# EAGLE board clk_master (EAGLE 9.6.1)
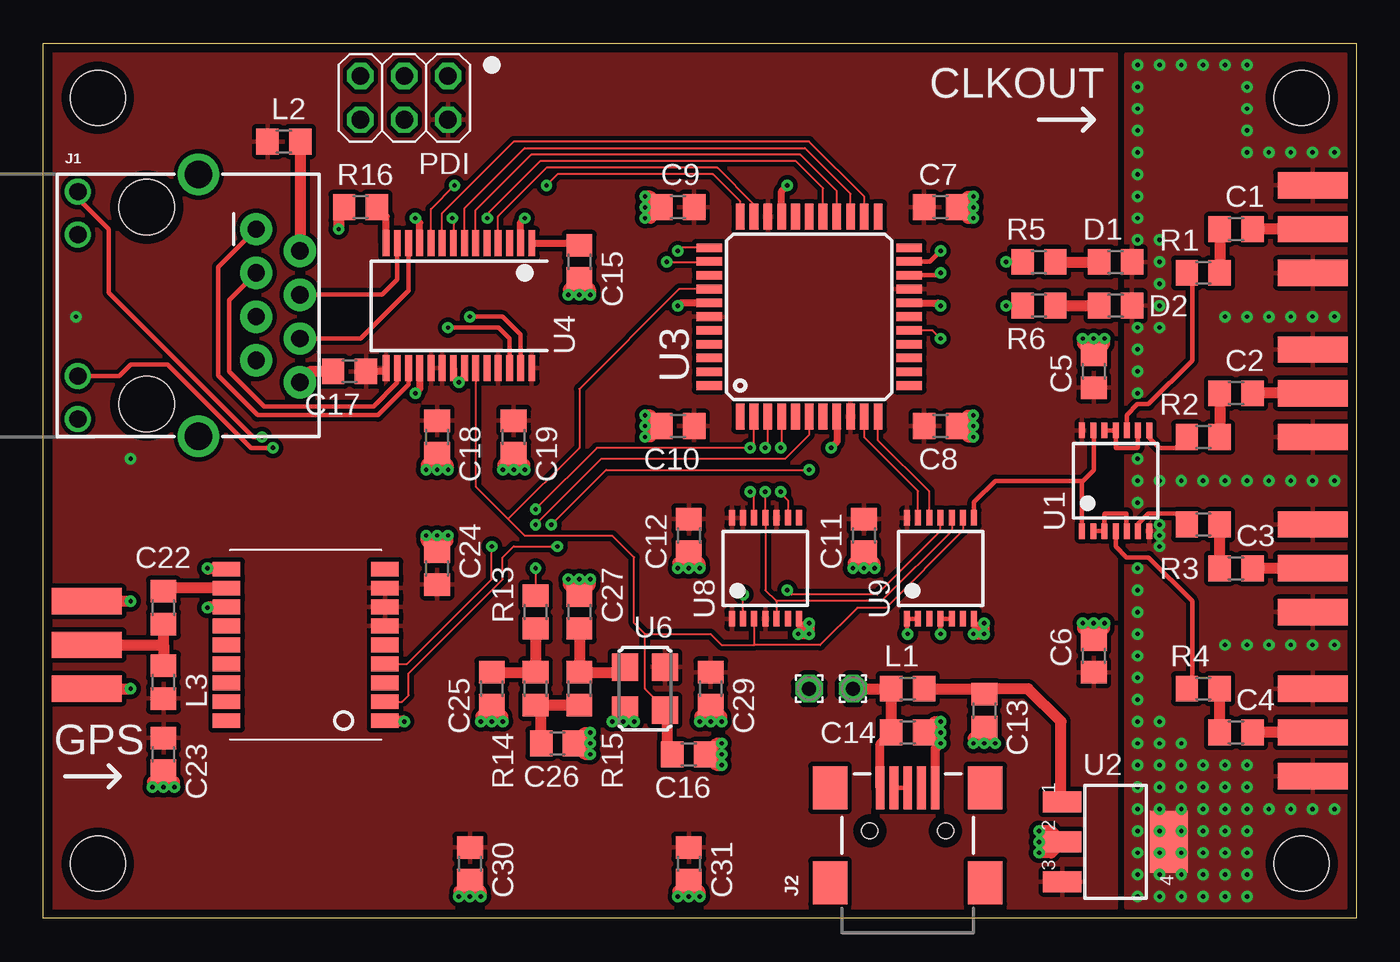
[diagram p0: board, top side]
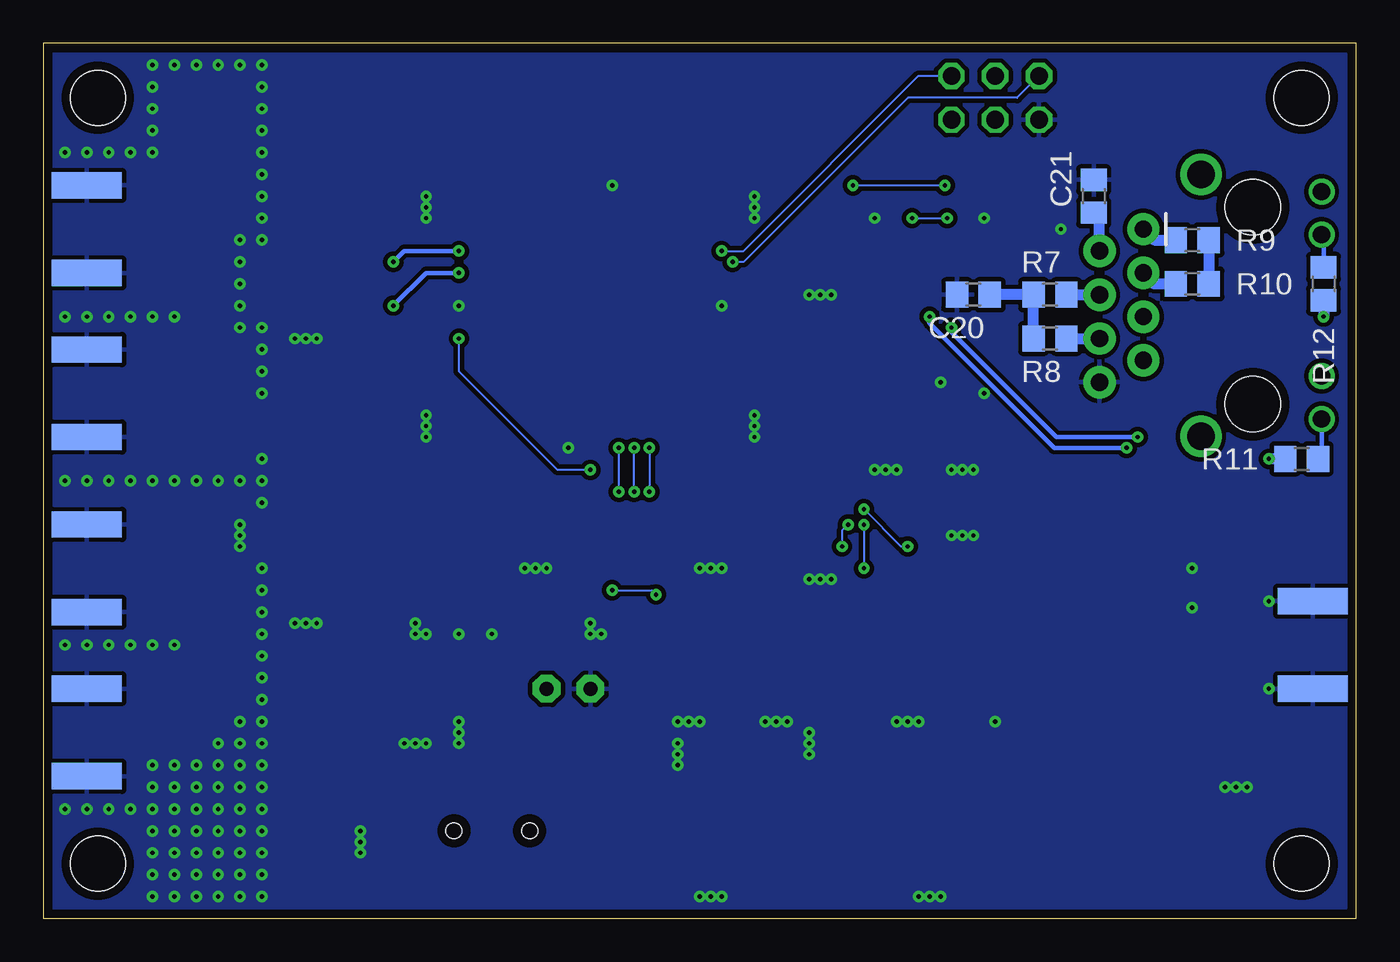
[diagram p1: board, bottom side, seen from below]

Size 76.2 x 50.8 mm. Coordinates in mm from the lower left corner, seen from the top.
Outline: 0,0 0,50.8 76.2,50.8 76.2,0 0,0
Copper layers (1*16): Top 0.035mm / dielectric 0.5mm / Bottom 0.035mm
Design rules "33each": minimum track width 5mil, minimum drill 10mil, track to track 5mil, track to pad 5mil, pad to pad 5mil, via to via 5mil, smd to smd 5mil, copper to edge 20mil, drill to drill 8mil, minimum pad ring 10mil, minimum via ring 8mil, stop-mask expansion 4mil, vias tented up to drill 0mil, thermal gap 10mil
Holes 3.17 mm at 3.17,3.17 73.03,3.17 73.03,47.62 3.17,47.62

## Footprints (pad centres in the part's own frame; a part is rotated, then mirrored left to right if it is on the bottom)
R0805 = smd 1.3 x 1.5: 1 -0.95,0; 2 0.95,0
1,6/0,8 = drill 0.813 pad 1.6 octagon: 1 0,0
SMA-EDGE = smd 1.524 x 4.064: GND@0 0,0; GND@1 5.08,0; SIG 2.54,0 | smd 1.524 x 4.064 bottom: GND@2 0,0; GND@3 5.08,0
MAGJACK = drill 1 pad 1.88: 1 3.175,17.445; 2 4.445,19.985; 3 5.715,17.445; 4 6.985,19.985; 5 8.255,17.445; 6 9.525,19.985; 7 10.795,17.445; 8 12.065,19.985 | drill 1 pad 1.27: 9 1,7.1; 10 3.5,7.1; 11 11.7,7.1; 12 14.2,7.1 | drill 1.6 pad 2.184: M1 0,14.1; M2 15.2,14.1 | hole 3.2: 1.905,11.095; 13.335,11.095
USB-MINIB = smd 2.5 x 0.5: D+ 2.5,0; D- 2.5,0.8; GND 2.5,-1.6; ID 2.5,-0.8; VBUS 2.5,1.6 | smd 2.5 x 2: S1 -3,4.5; S2 2.5,4.5; S3 -3,-4.5; S4 2.5,-4.5 | hole 0.9: 0,2.2; 0,-2.2
2X03 = drill 1.016 octagon: 1 -2.54,-1.27; 2 -2.54,1.27; 3 0,-1.27; 4 0,1.27; 5 2.54,-1.27; 6 2.54,1.27
TSSOP14 = smd 0.35 x 0.9: 1 -1.95,-2.925; 2 -1.3,-2.925; 3 -0.65,-2.925; 4 0,-2.925; 5 0.65,-2.925; 6 1.3,-2.925; 7 1.95,-2.925; 8 1.95,2.925; 9 1.3,2.925; 10 0.65,2.925; 11 0,2.925; 12 -0.65,2.925; 13 -1.3,2.925; 14 -1.95,2.925
SOT223 = smd 1.219 x 2.235: 1 -2.311,-3.099; 2 0,-3.099; 3 2.311,-3.099 | smd 3.6 x 2.2: 4 0,3.099
TQFP44 = smd 1.5 x 0.5: 1 -5.8,4; 2 -5.8,3.2; 3 -5.8,2.4; 4 -5.8,1.6; 5 -5.8,0.8; 6 -5.8,0; 7 -5.8,-0.8; 8 -5.8,-1.6; 9 -5.8,-2.4; 10 -5.8,-3.2; 11 -5.8,-4; 23 5.8,-4; 24 5.8,-3.2; 25 5.8,-2.4; 26 5.8,-1.6; 27 5.8,-0.8; 28 5.8,0; 29 5.8,0.8; 30 5.8,1.6; 31 5.8,2.4; 32 5.8,3.2; 33 5.8,4 | smd 0.5 x 1.5: 12 -4,-5.8; 13 -3.2,-5.8; 14 -2.4,-5.8; 15 -1.6,-5.8; 16 -0.8,-5.8; 17 0,-5.8; 18 0.8,-5.8; 19 1.6,-5.8; 20 2.4,-5.8; 21 3.2,-5.8; 22 4,-5.8; 34 4,5.8; 35 3.2,5.8; 36 2.4,5.8; 37 1.6,5.8; 38 0.8,5.8; 39 0,5.8; 40 -0.8,5.8; 41 -1.6,5.8; 42 -2.4,5.8; 43 -3.2,5.8; 44 -4,5.8
SSOP28 = smd 0.4 x 1.5: 1 -4.225,-3.625; 2 -3.575,-3.625; 3 -2.925,-3.625; 4 -2.275,-3.625; 5 -1.625,-3.625; 6 -0.975,-3.625; 7 -0.325,-3.625; 8 0.325,-3.625; 9 0.975,-3.625; 10 1.625,-3.625; 11 2.275,-3.625; 12 2.925,-3.625; 13 3.575,-3.625; 14 4.225,-3.625; 15 4.225,3.625; 16 3.575,3.625; 17 2.925,3.625; 18 2.275,3.625; 19 1.625,3.625; 20 0.975,3.625; 21 0.325,3.625; 22 -0.325,3.625; 23 -0.975,3.625; 24 -1.625,3.625; 25 -2.275,3.625; 26 -2.925,3.625; 27 -3.575,3.625; 28 -4.225,3.625
LCC-18 = smd 1.6 x 0.85: 1 -4.6,4.4; 2 -4.6,3.3; 3 -4.6,2.2; 4 -4.6,1.1; 5 -4.6,0; 6 -4.6,-1.1; 7 -4.6,-2.2; 8 -4.6,-3.3; 9 -4.6,-4.4; 10 4.6,-4.4; 11 4.6,-3.3; 12 4.6,-2.2; 13 4.6,-1.1; 14 4.6,0; 15 4.6,1.1; 16 4.6,2.2; 17 4.6,3.3; 18 4.6,4.4
ASF = smd 1.6 x 1.5: 1 -1.25,-1.15; 2 1.25,-1.15; 3 1.25,1.15; 4 -1.25,1.15

## Placement (x,y rotation side)
C1  47n  [R0805]  69.22,40.01 0 top
C2  47n  [R0805]  69.22,30.48 0 top
C3  47n  [R0805]  69.22,20.32 0 top
C4  47n  [R0805]  69.22,10.79 0 top
C5  100n  [R0805]  60.96,31.75 90 top
C6  100n  [R0805]  60.96,15.24 90 top
C7  100n  [R0805]  52.07,41.27 0 top
C8  100n  [R0805]  52.07,28.57 0 top
C9  100n  [R0805]  36.83,41.27 180 top
C10  100n  [R0805]  36.83,28.57 180 top
C11  100n  [R0805]  47.62,22.23 270 top
C12  100n  [R0805]  37.47,22.23 270 top
C13  100u  [R0805]  54.61,12.06 270 top
C14  100n  [R0805]  50.16,10.79 0 top
C15  10u  [R0805]  31.11,38.1 270 top
C16  unpopulated  [R0805]  37.47,9.53 0 top
C17  100n  [R0805]  17.78,31.75 180 top
C18  100n  [R0805]  22.86,27.94 270 top
C19  100n  [R0805]  27.3,27.94 270 top
C20  100n  [R0805]  22.23,36.2 180 bottom
C21  [R0805]  15.24,41.91 90 bottom
C22  47n  [R0805]  6.99,18.03 90 top
C23  100n  [R0805]  6.99,9.53 270 top
C24  100n  [R0805]  22.86,20.32 90 top
C25  100n  [R0805]  26.04,13.34 270 top
C26  3.3u  [R0805]  29.84,10.16 0 top
C27  100u  [R0805]  31.11,17.78 90 top
C29  100n  [R0805]  38.73,13.34 270 top
C30  100u  [R0805]  24.77,3.17 270 top
C31  100u  [R0805]  37.47,3.17 270 top
D1  [R0805]  62.23,38.1 0 top
D2  [R0805]  62.23,35.56 0 top
E$1  [1,6/0,8]  46.99,13.34 0 top
E$2  [1,6/0,8]  44.45,13.34 0 top
E$7  [SMA-EDGE]  73.66,37.47 90 top
E$8  [SMA-EDGE]  73.66,27.94 90 top
E$9  [SMA-EDGE]  73.66,17.78 90 top
E$10  [SMA-EDGE]  73.66,8.26 90 top
E$46  [SMA-EDGE]  2.54,13.34 90 top
J1  [MAGJACK]  -5.08,43.18 270 top
J2  [USB-MINIB]  50.16,5.08 90 top
L1  10u  [R0805]  50.16,13.34 180 top
L2  10u  [R0805]  13.97,45.09 180 top
L3  22n  [R0805]  6.99,13.72 90 top
PDI  [2X03]  20.95,47.62 180 top
R1  49.9  [R0805]  67.31,37.47 0 top
R2  49.9  [R0805]  67.31,27.94 0 top
R3  49.9  [R0805]  67.31,22.86 0 top
R4  49.9  [R0805]  67.31,13.34 0 top
R5  330  [R0805]  57.78,38.1 0 top
R6  330  [R0805]  57.78,35.56 0 top
R7  49.9  [R0805]  17.78,36.2 180 bottom
R8  49.9  [R0805]  17.78,33.66 180 bottom
R9  49.9  [R0805]  9.53,39.37 0 bottom
R10  49.9  [R0805]  9.53,36.83 0 bottom
R11  330  [R0805]  3.17,26.67 180 bottom
R12  330  [R0805]  1.91,36.83 270 bottom
R13  1k  [R0805]  28.57,17.78 90 top
R14  3.3k  [R0805]  28.57,13.34 90 top
R15  10k  [R0805]  31.11,13.34 90 top
R16  2.32k  [R0805]  18.41,41.27 180 top
U1  74LVCU04A  [TSSOP14]  62.23,25.4 0 top
U2  MCP1824ST-3302E  [SOT223]  62.23,4.45 270 top
U3  ATXMEGA16A4U  [TQFP44]  44.45,34.92 90 top
U4  ENC28J60  [SSOP28]  24.13,35.56 180 top
U5  TESEO-LIV3R  [LCC-18]  15.24,15.88 180 top
U6  SIT5156AI-FD-33VT-25.000000Y  [ASF]  34.92,13.34 270 top
U8  74LVC74A  [TSSOP14]  41.91,20.32 0 top
U9  74LVC86A  [TSSOP14]  52.07,20.32 0 top

## Library data of the parts
C1-C27 C29-C31 D1 D2 L1-L3 R1-R16 = rcl
E$1 E$2 = wirepad
E$7-E$10 E$46 = SparkFun-Retired
J1 J2 = SparkFun-Connectors
PDI = pinhead
U1 U8 U9 = 74xx-us
U2 = transistor
U3 = atmel
U4 = microchip
U5 = misc
U6 = crystal

## Nets
!INT: U3.32 U4.4
!RESET: PDI.5 U3.35
!RST: U3.33 U4.10
!SS: U3.24 U4.9
BPSK: U1.1 U1.13 U9.8
CCA: U3.10 U9.13
CCB: U3.11 U9.12
CLK_25MHZ: C16.1 U3.37 U4.23 U6.3 U8.3 U9.9
DAC0: R13.2 U3.6
FILT: C27.1 R15.2 U6.1
FILT1: C25.1 R13.1 R14.2
FILT2: C26.1 R14.1 R15.1
GND: C5.2 C6.2 C7.2 C8.2 C9.2 C10.2 C11.2 C12.2 C13.2 C14.2 C15.2 C16.2 C17.2 C18.2 C19.2 C20.2 C21.2 C23.2 C24.2 C25.2 C26.2 C27.2 C29.2 C30.2 C31.2 D1.2 D2.2 E$2.1 E$7.GND@0 E$7.GND@1 E$7.GND@2 E$7.GND@3 E$8.GND@0 E$8.GND@1 E$8.GND@2 E$8.GND@3 E$9.GND@0 E$9.GND@1 E$9.GND@2 E$9.GND@3 E$10.GND@0 E$10.GND@1 E$10.GND@2 E$10.GND@3 E$46.GND@0 E$46.GND@1 E$46.GND@2 E$46.GND@3 J1.8 J2.GND PDI.6 R16.2 U1.7 U2.2 U2.4 U3.8 U3.18 U3.30 U3.38 U4.2 U4.11 U4.18 U4.21 U4.22 U5.1 U5.10 U5.12 U6.2 U8.7 U9.1 U9.2 U9.4 U9.5 U9.7
GPS_ANT: C22.1 E$46.SIG L3.2
GPS_ANT1: C22.2 U5.11
GPS_TX: U3.16 U5.2
LED0: R6.1 U3.20
LED1: R5.1 U3.21
LEDA: J1.11 U4.27
LEDB: J1.9 U4.26
MISO: U3.26 U4.6
MOSI: U3.25 U4.7
OUT0: C1.2 E$7.SIG
OUT1: C2.2 E$8.SIG
OUT2: C3.2 E$9.SIG
OUT3: C4.2 E$10.SIG
PDI: PDI.1 U3.34
PPS: U3.2 U5.4 U8.12
RBIAS: R16.1 U4.14
S$5: C4.1 R4.2
S$6: C3.1 R3.2
S$7: C2.1 R2.2
S$8: C1.1 R1.2
S$9: R3.1 U1.6
S$10: R2.1 U1.8
S$11: R4.1 U1.4
S$12: R1.1 U1.10
S$13: U1.2 U1.3 U1.5
S$14: U1.9 U1.11 U1.12
S$19: J1.12 R11.1
S$22: J2.D+ J2.D-
S$36: D1.1 R5.2
S$37: D2.1 R6.2
S$49: R9.2 R10.2
S$50: C20.1 R7.2 R8.2
S$51: C21.1 J1.2 L2.1
S$54: J1.10 R12.1
SCK: U3.27 U4.8
SPPS: U3.3 U8.5 U8.11 U9.10
TPIN+: J1.4 R7.1 U4.13
TPIN-: J1.6 R8.1 U4.12
TPOUT+: J1.1 R9.1 U4.17
TPOUT-: J1.3 R10.1 U4.16
U/!D: U3.4 U8.9
UPPS: U8.2 U9.11
V3.3: C5.1 C6.1 C7.1 C8.1 C9.1 C10.1 C11.1 C12.1 C17.1 C18.1 C19.1 C23.1 C24.1 C29.1 C30.1 C31.1 L2.2 L3.1 PDI.2 R11.2 R12.2 U1.14 U2.3 U3.9 U3.19 U3.31 U3.39 U4.15 U4.19 U4.20 U4.25 U4.28 U5.6 U5.7 U5.8 U6.4 U8.1 U8.4 U8.10 U8.13 U8.14 U9.14
V5: C13.1 L1.1 U2.1
VBUS: C14.1 E$1.1 J2.VBUS L1.2
VCAP: C15.1 U4.1

## Tracks (layer width: path | path; a pad name or v marks a point on that pad's centre or on a via)
!INT
  Top 0.127: U4.4 26.41,40.76 29.21,43.56 39.12,43.56 41.25,41.43 U3.32
!RESET  (via drill 0.25)
  Top 0.127: v36.2,38.1 38.62,38.1 U3.35
  Bottom 0.127: PDI.5 19.68,47.62 26.04,47.62 35.56,38.1 v36.2,38.1
!RST  (via drill 0.25)
  Top 0.127: v29.21,42.55 29.84,43.18 38.86,43.18 40.45,41.59 U3.33 | U4.10 22.5,41.17 v23.88,42.55
  Bottom 0.127: v29.21,42.55 v23.88,42.55
!SS
  Top 0.127: U4.9 23.16,40.94 27.3,45.09 44.45,45.09 47.65,41.88 U3.24
BPSK
  Top 0.254: U1.1 60.28,25.36 60.33,25.4 | 60.33,25.4 60.96,26.04 60.96,28.3 U1.13 | U9.8 54.02,24.18 55.24,25.4 60.33,25.4
CCA
  Top 0.127: U3.10 47.65,27.91 50.77,24.8 U9.13
CCB
  Top 0.127: U3.11 48.45,27.75 51.42,24.78 U9.12
CLK_25MHZ
  Top 0.127: U4.23 25.11,25.06 26.99,23.18 | 26.99,23.18 27.94,22.23 33.02,22.23 34.29,20.95 34.29,17.14 34.92,16.51 | U9.9 53.37,22.51 48.9,18.03 47.24,18.03 45.09,15.88 41.27,15.88 | U8.3 41.26,15.89 41.27,15.88 | 26.99,23.18 31.11,27.3 31.11,30.73 36.91,36.52 U3.37 | 34.92,16.51 38.73,16.51 39.37,15.88 41.27,15.88 | 34.92,16.51 34.92,13.34 36.08,12.19 U6.3 36.2,11.96
  Top 0.635: C16.1 36.2,9.85 36.2,11.96
DAC0  (via drill 0.25)
  Top 0.127: U3.6 44.45,28.07 43.05,26.67 32.38,26.67 v28.57,22.86 | v28.57,20.32 R13.2
  Bottom 0.127: v28.57,22.86 v28.57,20.32
FILT
  Top 0.635: 31.21,14.38 R15.2 | C27.1 R15.2 | R15.2 33.48,14.29 U6.1
FILT1
  Top 0.635: R13.1 R14.2 | 28.25,14.61 R14.2 | C25.1 R14.2
FILT2
  Top 0.635: 30.8,12.06 R15.1 R14.1 28.89,12.06 C26.1
GND  (via drill 0.25)
  Top 0.254: U9.7 54.02,16.55 v53.98,16.51 | v52.07,16.51 U9.4 U9.5 | U9.2 U9.1 50.12,16.55 v50.16,16.51 | U8.7 43.86,16.55 v43.81,16.51
  Top 0.406: U4.21 23.8,31.44 v24.13,31.11 24.45,31.44 U4.22 | U4.18 21.86,30.75 v21.59,30.48 | U4.11 21.86,40.38 v21.59,40.64 | U4.2 27.7,40.41 v27.94,40.64 | U3.8 46.05,27.64 v45.72,27.3 | U3.38 36.99,35.73 v36.83,35.56 | U3.30 42.85,42.22 v43.18,42.55 | U3.18 51.91,35.73 v52.07,35.56
  Top 0.508: J2.GND 51.77,9.86 v52.07,10.16
  Top 0.635: C5.2 61.59,33.34 v61.59,33.66 | C5.2 60.33,33.34 v60.33,33.66 | C5.2 v60.96,33.66 | C29.2 v38.73,11.43 | C29.2 38.1,11.75 v38.1,11.43 | C29.2 39.37,11.75 v39.37,11.43 | C25.2 v26.04,11.43 | C25.2 25.4,11.75 v25.4,11.43 | C25.2 26.67,11.75 v26.67,11.43 | C26.2 31.43,9.53 v31.75,9.53 | C26.2 v31.75,10.16 | C26.2 31.43,10.79 v31.75,10.79 | C27.2 v31.11,19.68 | C27.2 30.48,19.36 v30.48,19.68 | C27.2 31.75,19.36 v31.75,19.68 | U2.2 v57.78,4.45 | U2.2 58.5,5.08 v57.78,5.08 | U2.2 58.5,3.81 v57.78,3.81 | C14.2 v52.07,10.79 | C14.2 51.75,11.43 v52.07,11.43 | C14.2 51.44,10.79 v52.07,10.16 | C13.2 v54.61,10.16 | C13.2 53.98,10.48 v53.98,10.16 | C13.2 54.61,10.79 v55.24,10.16 | C30.2 v24.77,1.27 | C31.2 v37.47,1.27 | C30.2 24.13,1.59 v24.13,1.27 | C30.2 25.4,1.59 v25.4,1.27 | C31.2 38.1,1.59 v38.1,1.27 | C31.2 36.83,1.59 v36.83,1.27 | C6.2 61.59,16.82 v61.59,17.14 | C6.2 60.33,16.82 v60.33,17.14 | C6.2 v60.96,17.14 | C11.2 46.99,20.64 v46.99,20.32 | C11.2 48.26,20.64 v48.26,20.32 | C11.2 v47.62,20.32 | C12.2 36.83,20.64 v36.83,20.32 | C12.2 38.1,20.64 v38.1,20.32 | C12.2 v37.47,20.32 | C10.2 35.24,29.21 v34.92,29.21 | C10.2 35.24,27.94 v34.92,27.94 | C10.2 v34.92,28.57 | C18.2 22.23,26.36 v22.23,26.04 | C18.2 23.5,26.36 v23.5,26.04 | C18.2 v22.86,26.04 | C8.2 53.66,27.94 v53.98,27.94 | C8.2 53.66,29.21 v53.98,29.21 | C8.2 v53.98,28.57 | C7.2 53.66,40.64 v53.98,40.64 | C7.2 53.66,41.91 v53.98,41.91 | C7.2 v53.98,41.27 | C9.2 35.24,41.91 v34.92,41.91 | C9.2 35.24,40.64 v34.92,40.64 | C9.2 v34.92,41.27 | E$46.GND@3 v5.08,18.41 | E$46.GND@2 v5.08,13.34 | C19.2 26.67,26.36 v26.67,26.04 | C19.2 27.94,26.36 v27.94,26.04 | C19.2 v27.3,26.04 | C23.2 v6.99,7.62 | C23.2 6.35,7.94 v6.35,7.62
  Top 0.635: C23.2 7.62,7.94 v7.62,7.62 | C24.2 v22.86,22.23 | C24.2 22.23,21.91 v22.23,22.23 | C24.2 23.5,21.91 v23.5,22.23 | U5.1 20.91,11.47 v20.95,11.43 | U5.12 9.57,18.07 v9.53,18.03 | U5.10 9.57,20.27 v9.53,20.32 | C15.2 30.48,36.52 v30.48,36.2 | C15.2 31.75,36.52 v31.75,36.2 | C15.2 v31.11,36.2 | R16.2 17.14,40.95 v17.14,40.01 | C17.2 15.54,31.75 J1.8 | U6.2 33.77,11.55 v33.66,11.43 | U6.2 33.77,11.95 v34.29,11.43 | U6.2 33.12,11.43 v33.02,11.43 | C16.2 v39.37,9.53 | C16.2 38.73,9.53 | C16.2 39.05,8.89 v39.37,8.89 | v39.37,10.16 39.05,10.16 C16.2 | v54.61,17.14 v53.98,16.51 v54.61,16.51 v54.61,17.14 | v44.45,17.14 v44.45,16.51 v43.81,16.51 v44.45,17.14
  other vias: 63.5,49.53 64.77,49.53 66.04,49.53 67.31,49.53 68.58,49.53 69.85,49.53 69.85,48.26 69.85,46.99 69.85,45.72 69.85,44.45 71.12,44.45 72.39,44.45 73.66,44.45 74.93,44.45 74.93,25.4 73.66,25.4 72.39,25.4 74.93,6.35 73.66,6.35 72.39,6.35 71.12,6.35 69.85,6.35 69.85,5.08 69.85,3.81 69.85,2.54 69.85,1.27 68.58,1.27 67.31,1.27 66.04,1.27 64.77,1.27 63.5,1.27 63.5,2.54 63.5,3.81 63.5,5.08 63.5,6.35 63.5,7.62 63.5,8.89 63.5,10.16 63.5,11.43 63.5,12.7 63.5,13.97 63.5,15.24 63.5,16.51 63.5,17.78 63.5,19.05 63.5,20.32 63.5,48.26 63.5,46.99 63.5,45.72 63.5,44.45 63.5,43.18 63.5,41.91 63.5,40.64 63.5,39.37 64.77,38.1 64.77,36.83 64.77,35.56 63.5,34.29 63.5,33.02 63.5,31.75 63.5,30.48 64.77,22.86 64.77,21.59 63.5,25.4 63.5,26.67 63.5,24.13 71.12,25.4 69.85,25.4 68.58,25.4 67.31,25.4 66.04,25.4 64.77,25.4 74.93,34.92 73.66,34.92 72.39,34.92 71.12,34.92 69.85,34.92 68.58,34.92 74.93,15.88 73.66,15.88 72.39,15.88 71.12,15.88 69.85,15.88 68.58,15.88 64.77,22.23 64.77,7.62 66.04,7.62 67.31,7.62 64.77,6.35 64.77,5.08 64.77,3.81 64.77,2.54 66.04,6.35 67.31,6.35 66.04,5.08 66.04,3.81 66.04,2.54 67.31,5.08 67.31,3.81 67.31,2.54 68.58,7.62 68.58,6.35 68.58,5.08 68.58,3.81 68.58,2.54 67.31,8.89 66.04,8.89 64.77,8.89 66.04,10.16 64.77,10.16 64.77,11.43 69.85,7.62 69.85,8.89 68.58,8.89 64.77,39.37 64.77,34.29
  pour Bottom (isolate 0.254): 0.64,50.16 75.56,50.16 75.56,0.64 0.64,0.64
  pour Top (isolate 0.254): 62.87,50.16 62.87,0.64 75.56,0.64 75.56,50.16
  pour Top (no thermals): 63.5,7.62 67.31,7.62 67.31,1.91 63.5,1.91
GPS_ANT
  Top 0.635: E$46.SIG 6.99,15.88 | 6.99,15.88 C22.1 | 6.99,15.88 L3.2
GPS_ANT1
  Top 0.635: U5.11 7.18,19.18 C22.2
GPS_TX  (via drill 0.25)
  Top 0.127: U5.2 20.83,12.57 21.21,12.95 21.21,14.22 26.67,19.68 26.67,20.95 27.3,21.59 v29.84,21.59 | v29.49,22.86 32.66,26.04 v44.45,26.04 | v52.07,33.66 51.6,34.12 U3.16
  Bottom 0.127: v29.49,22.86 29.84,22.5 v29.84,21.59 | v44.45,26.04 46.35,26.04 52.07,31.75 v52.07,33.66
LED0  (via drill 0.25)
  Top 0.254: U3.20 51.93,37.33 v52.07,37.47 | v55.88,35.56 R6.1
  Bottom 0.254: v52.07,37.47 53.98,37.47 v55.88,35.56
LED1  (via drill 0.25)
  Top 0.254: U3.21 51.46,38.12 v52.07,38.73 | v55.88,38.1 R5.1
  Bottom 0.254: v52.07,38.73 55.24,38.73 v55.88,38.1
LEDA  (via drill 0.25)
  Top 0.254: v24.77,34.92 26.67,34.92 27.7,33.89 U4.27 | J1.11 4.43,31.48 5.08,32.13 7.24,32.13 12.06,27.3 v13.34,27.3
  Bottom 0.254: v13.34,27.3 17.53,27.3 24.77,34.54 v24.77,34.92
LEDB  (via drill 0.25)
  Top 0.254: J1.9 2.02,41.8 3.81,40.01 3.81,36.32 12.19,27.94 v12.7,27.94 | v23.5,34.29 26.42,34.29 27.05,33.65 U4.26
  Bottom 0.254: v12.7,27.94 17.4,27.94 23.5,34.04 v23.5,34.29
MISO
  Top 0.127: U4.6 25.11,41.11 28.32,44.32 43.94,44.32 46.05,42.22 U3.26
MOSI
  Top 0.127: U4.7 24.45,41.22 27.94,44.7 44.2,44.7 46.35,42.55 46.38,42.52 46.85,42.05 U3.25
OUT0
  Top 0.635: E$7.SIG C1.2
OUT1
  Top 0.635: E$8.SIG C2.2
OUT2
  Top 0.635: E$9.SIG C3.2
OUT3
  Top 0.635: E$10.SIG C4.2
PDI  (via drill 0.25)
  Top 0.127: U3.34 37.02,38.92 v36.83,38.73
  Bottom 0.127: v36.83,38.73 35.56,38.73 25.4,48.9 PDI.1
PPS  (via drill 0.25)
  Top 0.127: U8.12 41.26,24.53 v41.02,24.77 | U3.2 41.25,27.53 v41.02,27.3 32.13,27.3 v28.57,23.75 | U5.4 21.12,14.78 26.04,19.68 v26.04,21.59
  Bottom 0.127: v41.02,27.3 v41.02,24.77 | v28.57,23.75 26.42,21.59 v26.04,21.59
RBIAS
  Top 0.406: U4.14 19.91,40.73 R16.1
S$5
  Top 0.61: R4.2
  Top 0.635: C4.1 R4.2
S$6
  Top 0.61: R3.2
  Top 0.635: C3.1 R3.2
S$7
  Top 0.61: R2.2
  Top 0.635: C2.1 R2.2
S$8
  Top 0.61: R1.2
  Top 0.635: C1.1 R1.2
S$9
  Top 0.254: U1.6 63.53,22.89 64.14,23.5 65.72,23.5 R3.1
S$10
  Top 0.254: U1.8 64.18,27.89 64.77,27.3 65.72,27.3 R2.1
S$11
  Top 0.254: U1.4 62.23,21.59 62.87,20.95 64.14,20.95 66.67,18.41 66.67,13.65 R4.1
S$12
  Top 0.254: U1.10 62.88,29.23 63.5,29.84 64.14,29.84 66.67,32.38 66.67,37.15 R1.1
S$13
  Top 0.254: U1.5 62.87,22.49 62.87,23.5 61.59,23.5 61.58,23.48 U1.3 U1.2
S$14
  Top 0.254: U1.12 U1.11 62.23,27.3 63.5,27.3 63.53,27.34 U1.9
S$19
  Bottom 0.254: J1.12 2.02,26.88 R11.1
S$22
  Top 0.254: J2.D- J2.D+
S$36
  Top 0.635: R5.2 D1.1
S$37
  Top 0.635: R6.2 D2.1
S$49
  Bottom 0.635: R9.2 R10.2
S$50
  Bottom 0.635: R8.2 R7.2 C20.1
S$51
  Top 0.635: L2.1 14.92,38.75 J1.2
  Bottom 0.635: J1.2 14.9,40.62 C21.1
S$54
  Bottom 0.254: R12.1 1.91,39.56 J1.10
SCK  (via drill 0.25)
  Top 0.127: v25.78,40.64 25.78,40.89 28.83,43.94 43.69,43.94 44.77,42.86 44.78,42.85 45.25,42.38 U3.27 | v23.75,40.64 23.8,40.58 U4.8
  Bottom 0.127: v25.78,40.64 v23.75,40.64
SPPS  (via drill 0.25)
  Top 0.127: U9.10 52.72,22.49 48.64,18.41 42.55,18.41 | 42.55,18.41 42.55,17.41 U8.5 | 42.55,18.41 41.91,19.05 U8.11 v41.91,24.77 | v41.91,27.3 42.05,27.45 U3.3
  Bottom 0.127: v41.91,24.77 v41.91,27.3
TPIN+
  Top 0.254: U4.13 20.55,37.06 19.68,36.2 J1.4
  Bottom 0.635: R7.1 J1.4
TPIN-
  Top 0.254: U4.12 21.2,36.45 18.41,33.66 J1.6
  Bottom 0.635: R8.1 J1.6
TPOUT+
  Top 0.254: J1.1 10.16,37.8 10.16,31.5 12.45,29.21 19.43,29.21 21.2,30.98 U4.17
  Bottom 0.635: J1.1 11.73,39.37 R9.1
TPOUT-
  Top 0.254: U4.16 20.55,31.1 19.18,29.72 12.83,29.72 10.79,31.75 10.79,35.9 J1.3
  Bottom 0.635: J1.3 11.73,36.83 R10.1
U/!D  (via drill 0.25)
  Top 0.127: U3.4 42.85,27.36 v42.8,27.3 | v42.8,24.77 42.8,24.67 43.21,24.26 U8.9
  Bottom 0.127: v42.8,27.3 v42.8,24.77
UPPS  (via drill 0.25)
  Top 0.127: U8.2 40.61,18.77 v40.64,18.8 | v43.18,19.05 43.43,18.8 48.39,18.8 52.07,22.48 U9.11
  Bottom 0.127: v43.18,19.05 40.89,19.05 v40.64,18.8
V3.3  (via drill 0.25)
  Top 0.406: U4.15 19.72,31.75 C17.1
  Bottom 0.635: R12.2 v1.91,34.92 | R11.2 v5.08,26.67
  pour Top (isolate 0.254): 0.64,50.16 62.23,50.16 62.23,0.64 0.64,0.64
V5
  Top 0.635: L1.1 54.29,13.34 C13.1 54.93,13.34 57.15,13.34 59.05,11.43 59.05,6.83 U2.1
VBUS
  Top 0.508: J2.VBUS 48.56,10.14 C14.1
  Top 0.635: C14.1 L1.2 E$1.1
VCAP
  Top 0.406: U4.1 30.98,39.19 C15.1

## Text on the board
tPlace: CLKOUT | GPS